# Altium PCB ALio Arduino ver.PcbDoc (part 1 of 2)
Units mm, origin at the board's own origin, x right, y up, seen from the top; angles counter-clockwise.
Board outline 88.22 x 65.31 mm, 2 copper layers (Top Layer, Bottom Layer); 443 components, 0 nets, 3065 pads, 0 vias.
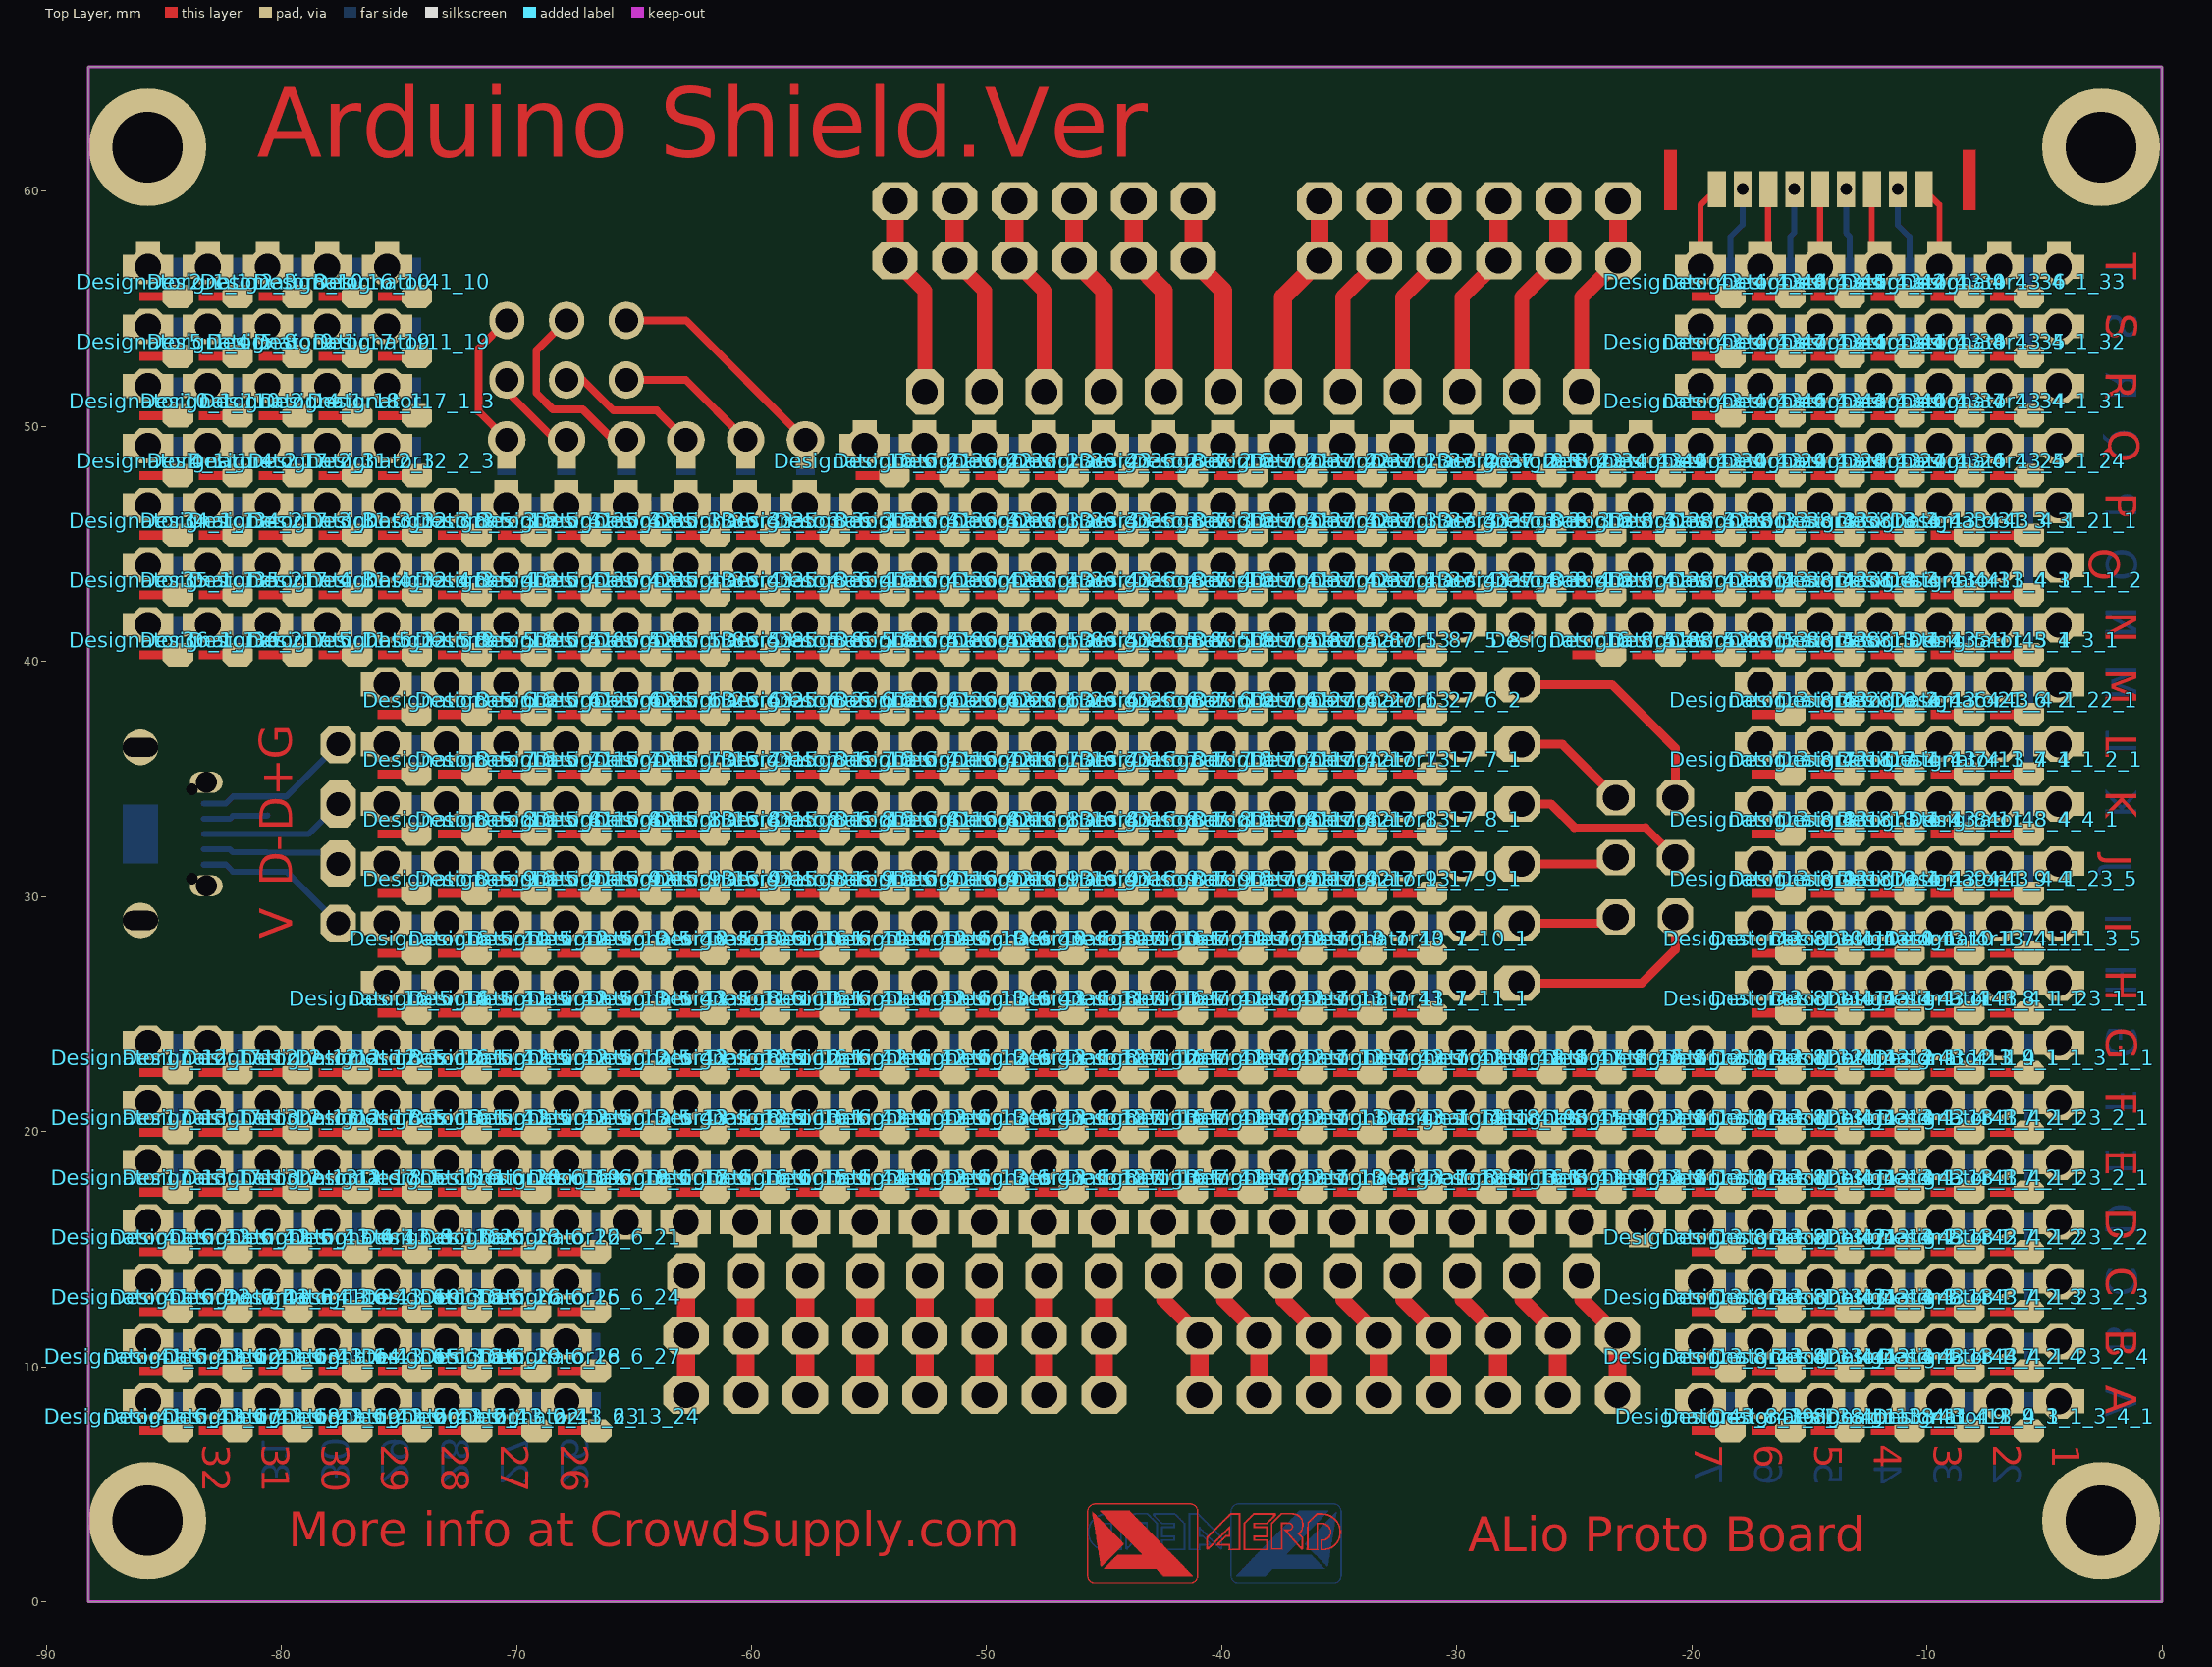
[diagram p0: Top Layer view]
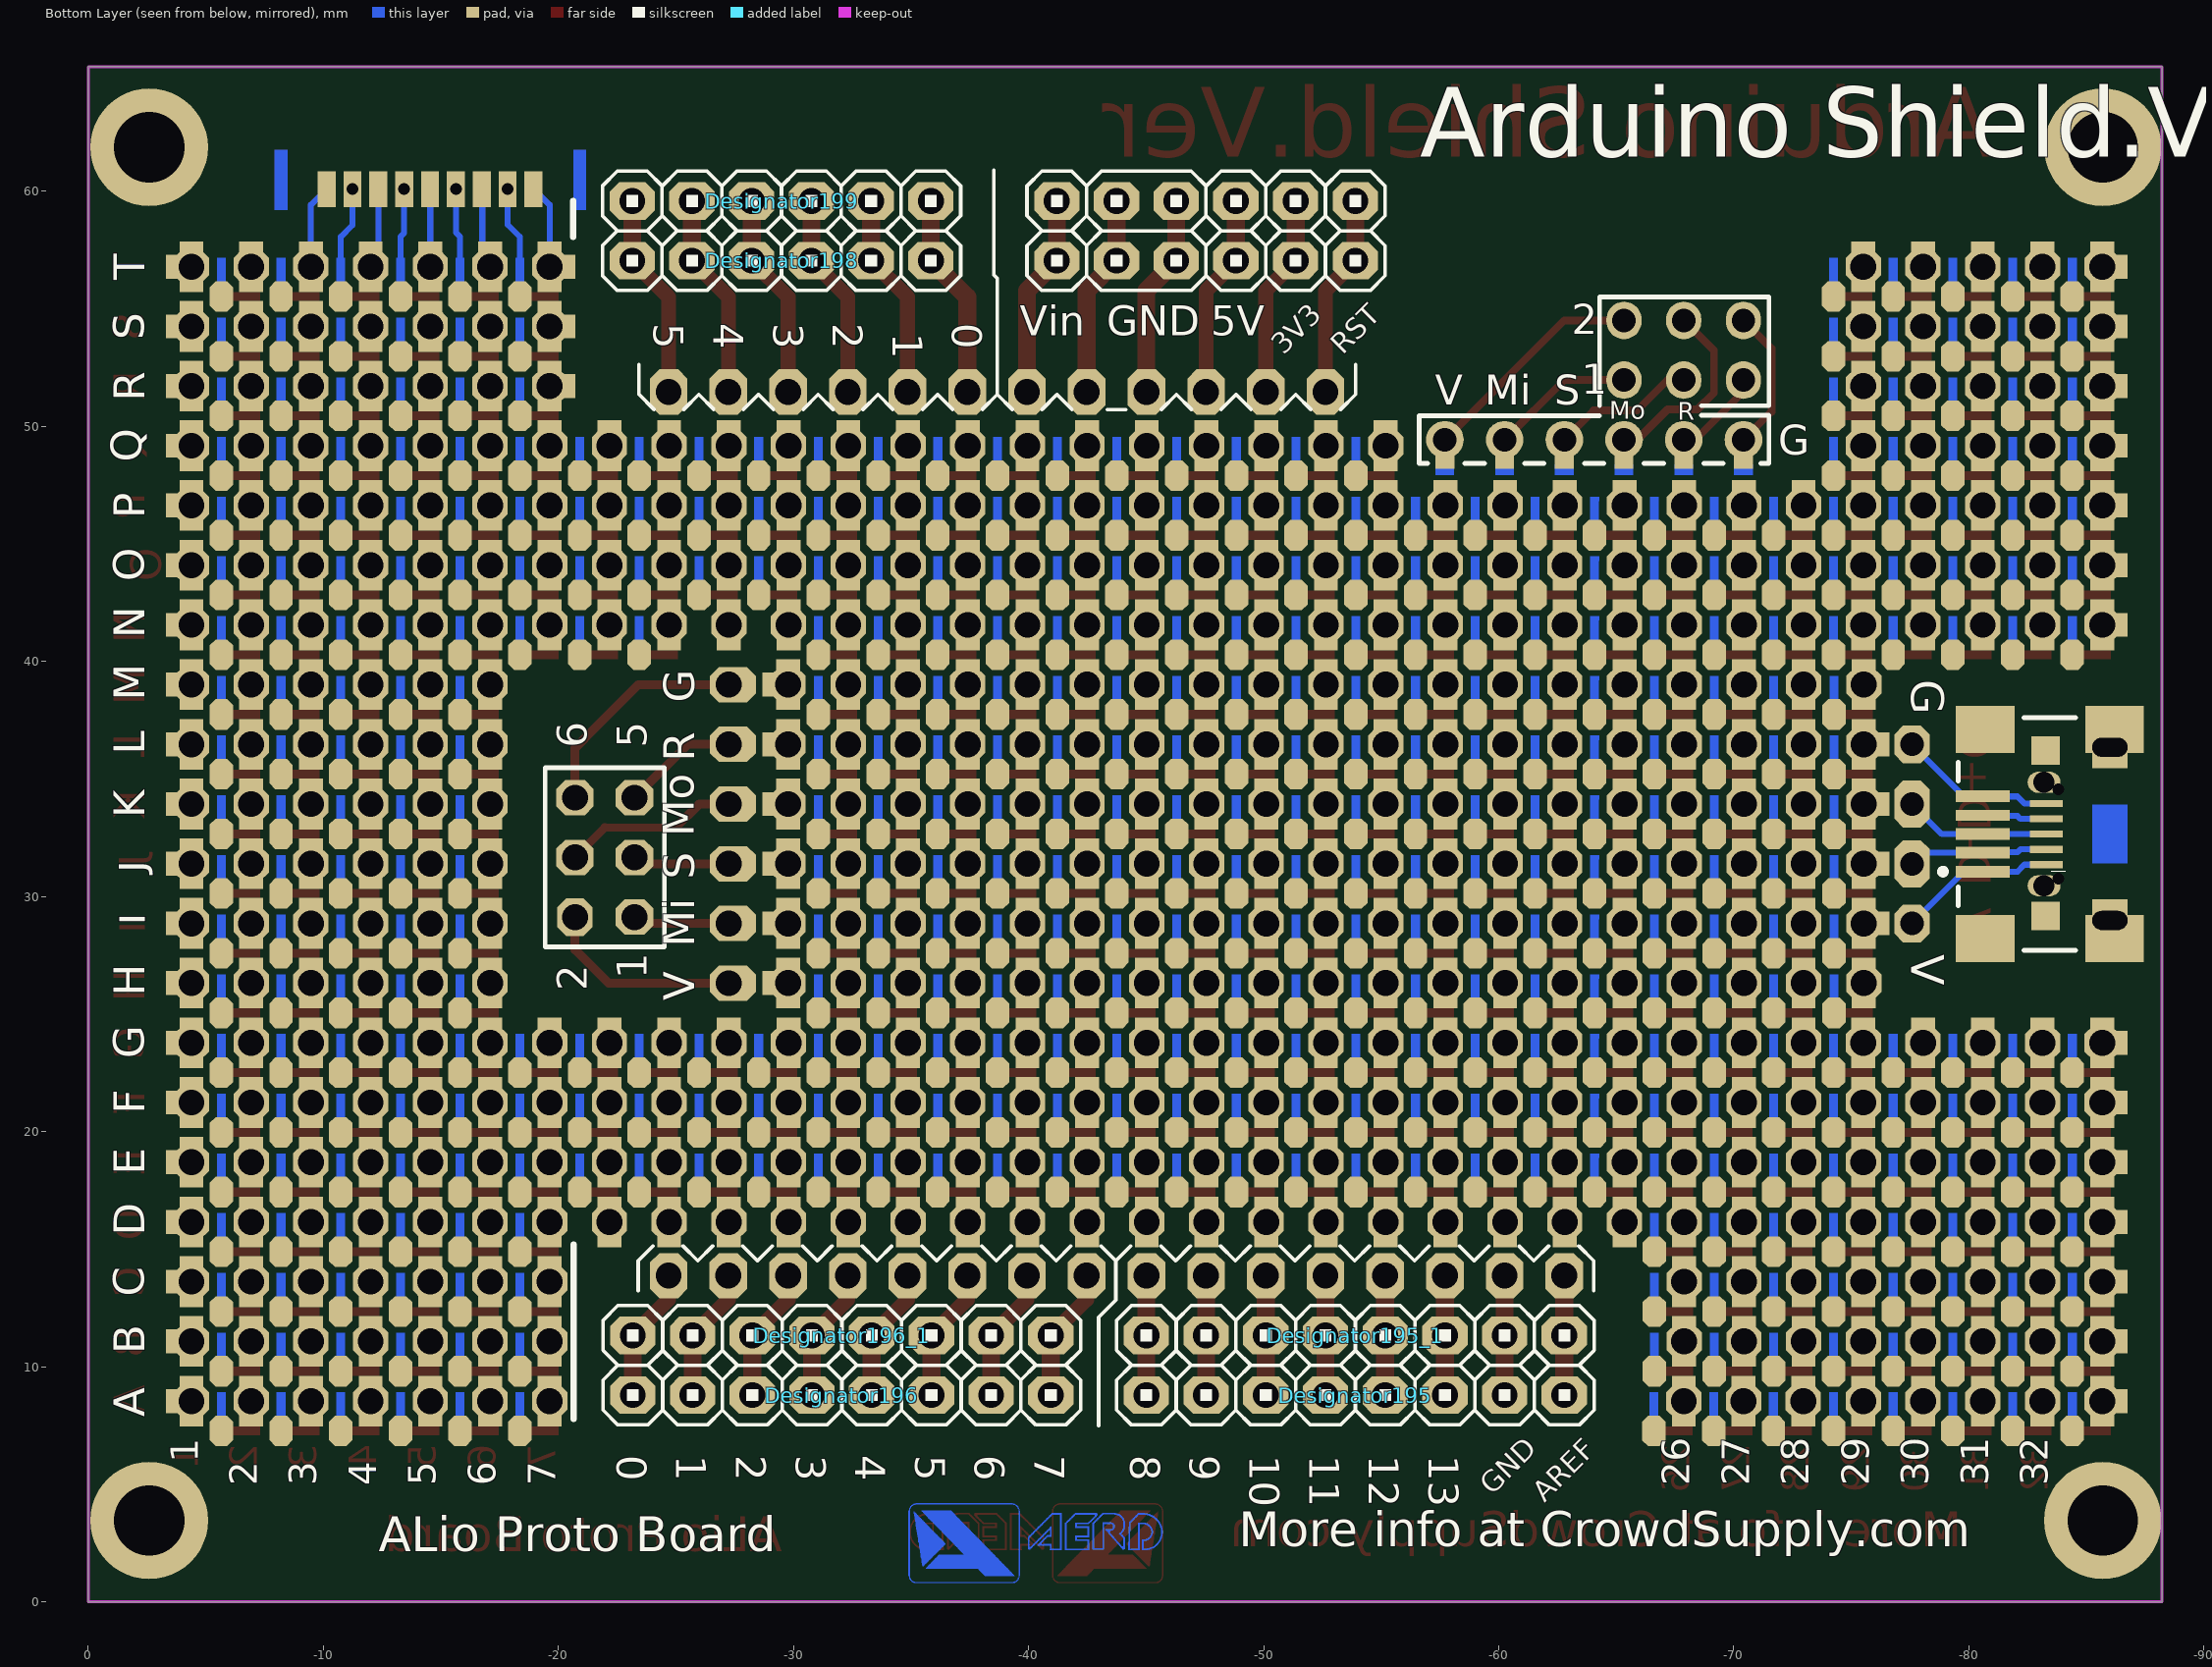
[diagram p1: Bottom Layer view, seen from below]

## Layer stack, top to bottom
Top Layer: signal copper 0.0356
Dielectric: dielectric 0.32, FR-4, Dk 4.8
Bottom Layer: signal copper 0.0356

## Board outline
-88.221,65.31 0,65.31 0,0 -88.221,0

## Design rules (kind name [scope] priority, off if disabled: settings)
Clearance [All] p1 off: gap=0.254
ComponentClearance [All] p1 off: gap=0.254 collisioncheckmode=3 verticalgap=0.254 showdistances=FALSE
HoleToHoleClearance [All] p1 off: gap=0.254 allowstackedmicrovias=TRUE
MinimumSolderMaskSliver [All] p1 off: minsoldermaskwidth=0.254
PolygonConnect [All] p1: connectstyle=Relief reliefconductorwidth=0.254 reliefentries=4 polygonreliefangle="90 Angle"
RoutingVias [All] p1: holewidth=0.711 width=1.27 viastyle="Through Hole" minholewidth=0.711 minwidth=1.27 maxholewidth=0.711 maxwidth=1.27
ShortCircuit [All] p1 off: allowed=FALSE
SilkscreenOverComponentPads [All] p1: minsilkscreentomaskgap=0.254
SolderMaskExpansion [All] p1: expansion=0.102
UnRoutedNet [All] p1 off:
Width [All] p1: maxlimit=1.016 minlimit=0.127 preferedwidth=0.254
22 further rules are at their usual default settings.

## Components (designator, comment, footprint, x,y, rotation, side; value= is the part's Value field where it differs from the comment)
Designator2_1_1 "Comment" PROTO2WL -85.672,56.8 r0 top
Designator2_3 "Comment" PROTO2WL -83.132,56.8 r0 top
Designator4_1_1 "Comment" PROTO2WL -85.672,49.18 r0 top
Designator4_2 "Comment" PROTO2WL -83.132,49.18 r0 top
Designator5_1_4 "Comment" PROTO2WL -85.672,54.26 r0 top
Designator5_8 "Comment" PROTO2WL -83.132,54.26 r0 top
Designator8_5_3_3 "Comment" PROTO2WL -72.972,46.64 r0 top
Designator8_5_4_3 "Comment" PROTO2WL -72.972,44.1 r0 top
Designator8_5_5_8 "Comment" PROTO2WL -72.972,41.56 r0 top
Designator8_5_6_2 "Comment" PROTO2WL -72.972,39.02 r0 top
Designator8_5_7_1 "Comment" PROTO2WL -72.972,36.48 r0 top
Designator8_5_8_1 "Comment" PROTO2WL -72.972,33.94 r0 top
Designator8_5_9_1 "Comment" PROTO2WL -72.972,31.4 r0 top
Designator8_5_12_1 "Comment" PROTO2WL -75.512,23.78 r0 top
Designator8_5_13_1 "Comment" PROTO2WL -75.512,18.7 r0 top
Designator8_5_13_1 "Comment" PROTO2WL -75.512,21.24 r0 top
Designator8_6_3_3 "Comment" PROTO2WL -57.732,46.64 r0 top
Designator8_6_4_3 "Comment" PROTO2WL -57.732,44.1 r0 top
Designator8_6_5_8 "Comment" PROTO2WL -57.732,41.56 r0 top
Designator8_6_6_2 "Comment" PROTO2WL -57.732,39.02 r0 top
Designator8_6_7_1 "Comment" PROTO2WL -57.732,36.48 r0 top
Designator8_6_8_1 "Comment" PROTO2WL -57.732,33.94 r0 top
Designator8_6_9_1 "Comment" PROTO2WL -57.732,31.4 r0 top
Designator8_6_10_1 "Comment" PROTO2WL -60.272,28.86 r0 top
Designator8_6_11_1 "Comment" PROTO2WL -60.272,26.32 r0 top
Designator8_6_12_1 "Comment" PROTO2WL -60.272,23.78 r0 top
Designator8_6_13_1 "Comment" PROTO2WL -60.272,21.24 r0 top
Designator8_7_2_3 "Comment" PROTO2WL -42.492,49.18 r0 top
Designator8_7_3_3 "Comment" PROTO2WL -42.492,46.64 r0 top
Designator8_7_4_3 "Comment" PROTO2WL -42.492,44.1 r0 top
Designator8_7_5_8 "Comment" PROTO2WL -42.492,41.56 r0 top
Designator8_7_6_2 "Comment" PROTO2WL -42.492,39.02 r0 top
Designator8_7_7_1 "Comment" PROTO2WL -42.492,36.48 r0 top
Designator8_7_8_1 "Comment" PROTO2WL -42.492,33.94 r0 top
Designator8_7_9_1 "Comment" PROTO2WL -42.492,31.4 r0 top
Designator8_7_10_1 "Comment" PROTO2WL -45.032,28.86 r0 top
Designator8_7_11_1 "Comment" PROTO2WL -45.032,26.32 r0 top
Designator8_7_12_1 "Comment" PROTO2WL -45.032,23.78 r0 top
Designator8_7_13_1 "Comment" PROTO2WL -45.032,18.7 r0 top
Designator8_7_13_1 "Comment" PROTO2WL -45.032,21.24 r0 top
Designator8_8_2_3 "Comment" PROTO2WL -27.252,49.18 r0 top
Designator8_8_3_3 "Comment" PROTO2WL -27.252,46.64 r0 top
Designator8_8_4_3 "Comment" PROTO2WL -27.252,44.1 r0 top
Designator8_8_13_1 "Comment" PROTO2WL -29.792,18.7 r0 top
Designator8_10 "Comment" PROTO2WL -80.592,56.8 r0 top
Designator9_1 "Comment" PROTO2WL -80.592,54.26 r0 top
Designator10_1_1 "Comment" PROTO2WL -85.672,51.72 r0 top
Designator10_2 "Comment" PROTO2WL -83.132,51.72 r0 top
Designator11_2_3 "Comment" PROTO2WL -78.052,49.18 r0 top
Designator11_3_3 "Comment" PROTO2WL -78.052,46.64 r0 top
Designator11_4_3 "Comment" PROTO2WL -78.052,44.1 r0 top
Designator11_5_2 "Comment" PROTO2WL -78.052,41.56 r0 top
Designator11_12_1 "Comment" PROTO2WL -80.592,23.78 r0 top
Designator11_13_1 "Comment" PROTO2WL -80.592,18.7 r0 top
Designator11_13_1 "Comment" PROTO2WL -80.592,21.24 r0 top
Designator11_19 "Comment" PROTO2WL -75.512,54.26 r0 top
Designator12_2_3 "Comment" PROTO2WL -75.512,49.18 r0 top
Designator12_3_3 "Comment" PROTO2WL -75.512,46.64 r0 top
Designator12_4_3 "Comment" PROTO2WL -75.512,44.1 r0 top
Designator12_5_8 "Comment" PROTO2WL -75.512,41.56 r0 top
Designator12_12_1 "Comment" PROTO2WL -78.052,23.78 r0 top
Designator12_17_1 "Comment" PROTO2WL -78.052,18.7 r0 top
Designator12_17_1 "Comment" PROTO2WL -78.052,21.24 r0 top
Designator13_4_1_1_1_2 "Comment" PROTO2WL -6.932,44.1 r0 top
Designator13_4_1_1_2_1 "Comment" PROTO2WL -6.932,36.48 r0 top
Designator13_4_1_1_3_1_1 "Comment" PROTO2WL -6.932,23.78 r0 top
Designator13_4_1_1_3_4_1 "Comment" PROTO2WL -6.932,8.54 r0 top
Designator13_4_1_1_3_5 "Comment" PROTO2WL -6.932,28.86 r0 top
Designator13_4_1_3_3 "Comment" PROTO2WL -12.012,46.64 r0 top
Designator13_4_1_4_3 "Comment" PROTO2WL -12.012,44.1 r0 top
Designator13_4_1_5_1 "Comment" PROTO2WL -12.012,41.56 r0 top
Designator13_4_1_6_2 "Comment" PROTO2WL -12.012,39.02 r0 top
Designator13_4_1_7_1 "Comment" PROTO2WL -12.012,36.48 r0 top
Designator13_4_1_8_1 "Comment" PROTO2WL -12.012,33.94 r0 top
Designator13_4_1_9_1 "Comment" PROTO2WL -12.012,31.4 r0 top
Designator13_4_1_10_1 "Comment" PROTO2WL -14.552,28.86 r0 top
Designator13_4_1_11_1 "Comment" PROTO2WL -14.552,26.32 r0 top
Designator13_4_1_12_1 "Comment" PROTO2WL -14.552,23.78 r0 top
Designator13_4_1_13_1 "Comment" PROTO2WL -14.552,21.24 r0 top
Designator13_4_1_13_1 "Comment" PROTO2WL -14.552,18.7 r0 top
Designator13_4_1_13_2 "Comment" PROTO2WL -14.552,16.16 r0 top
Designator13_4_1_13_3 "Comment" PROTO2WL -14.552,13.62 r0 top
Designator13_4_1_13_4 "Comment" PROTO2WL -14.552,11.08 r0 top
Designator13_4_1_18_1 "Comment" PROTO2WL -14.552,8.54 r0 top
Designator13_4_1_19 "Comment" PROTO2WL -12.012,8.54 r0 top
Designator13_5_3_3 "Comment" PROTO2WL -62.812,46.64 r0 top
Designator13_5_4_3 "Comment" PROTO2WL -62.812,44.1 r0 top
Designator13_5_5_8 "Comment" PROTO2WL -62.812,41.56 r0 top
Designator13_5_6_2 "Comment" PROTO2WL -62.812,39.02 r0 top
Designator13_5_7_1 "Comment" PROTO2WL -62.812,36.48 r0 top
Designator13_5_8_1 "Comment" PROTO2WL -62.812,33.94 r0 top
Designator13_5_9_1 "Comment" PROTO2WL -62.812,31.4 r0 top
Designator13_5_10_1 "Comment" PROTO2WL -65.352,28.86 r0 top
Designator13_5_11_1 "Comment" PROTO2WL -65.352,26.32 r0 top
Designator13_5_12_1 "Comment" PROTO2WL -65.352,23.78 r0 top
Designator13_5_13_1 "Comment" PROTO2WL -65.352,21.24 r0 top
Designator13_6_2_3 "Comment" PROTO2WL -47.572,49.18 r0 top
Designator13_6_3_3 "Comment" PROTO2WL -47.572,46.64 r0 top
Designator13_6_4_3 "Comment" PROTO2WL -47.572,44.1 r0 top
Designator13_6_5_8 "Comment" PROTO2WL -47.572,41.56 r0 top
Designator13_6_6_2 "Comment" PROTO2WL -47.572,39.02 r0 top
Designator13_6_7_1 "Comment" PROTO2WL -47.572,36.48 r0 top
Designator13_6_8_1 "Comment" PROTO2WL -47.572,33.94 r0 top
Designator13_6_9_1 "Comment" PROTO2WL -47.572,31.4 r0 top
Designator13_6_10_1 "Comment" PROTO2WL -50.112,28.86 r0 top
Designator13_6_11_1 "Comment" PROTO2WL -50.112,26.32 r0 top
Designator13_6_12_1 "Comment" PROTO2WL -50.112,23.78 r0 top
Designator13_6_13_1 "Comment" PROTO2WL -50.112,18.7 r0 top
Designator13_6_13_1 "Comment" PROTO2WL -50.112,21.24 r0 top
Designator13_7_2_3 "Comment" PROTO2WL -32.332,49.18 r0 top
Designator13_7_3_3 "Comment" PROTO2WL -32.332,46.64 r0 top
Designator13_7_4_3 "Comment" PROTO2WL -32.332,44.1 r0 top
Designator13_7_5_8 "Comment" PROTO2WL -32.332,41.56 r0 top
Designator13_7_6_2 "Comment" PROTO2WL -32.332,39.02 r0 top
Designator13_7_7_1 "Comment" PROTO2WL -32.332,36.48 r0 top
Designator13_7_8_1 "Comment" PROTO2WL -32.332,33.94 r0 top
Designator13_7_9_1 "Comment" PROTO2WL -32.332,31.4 r0 top
Designator13_7_10_1 "Comment" PROTO2WL -34.872,28.86 r0 top
Designator13_7_11_1 "Comment" PROTO2WL -34.872,26.32 r0 top
Designator13_7_12_1 "Comment" PROTO2WL -34.872,23.78 r0 top
Designator13_7_13_1 "Comment" PROTO2WL -34.872,18.7 r0 top
Designator13_7_13_1 "Comment" PROTO2WL -34.872,21.24 r0 top
Designator13_8_3_3 "Comment" PROTO2WL -17.092,46.64 r0 top
Designator13_8_4_3 "Comment" PROTO2WL -17.092,44.1 r0 top
Designator13_8_5_8 "Comment" PROTO2WL -17.092,41.56 r0 top
Designator13_8_6_2 "Comment" PROTO2WL -17.092,39.02 r0 top
Designator13_8_7_1 "Comment" PROTO2WL -17.092,36.48 r0 top
Designator13_8_8_1 "Comment" PROTO2WL -17.092,33.94 r0 top
Designator13_8_9_1 "Comment" PROTO2WL -17.092,31.4 r0 top
Designator13_8_12_1 "Comment" PROTO2WL -19.632,23.78 r0 top
Designator13_8_13_1 "Comment" PROTO2WL -19.632,21.24 r0 top
Designator13_8_13_1 "Comment" PROTO2WL -19.632,18.7 r0 top
Designator13_8_13_2 "Comment" PROTO2WL -19.632,16.16 r0 top
Designator13_8_13_3 "Comment" PROTO2WL -19.632,13.62 r0 top
Designator13_8_13_4 "Comment" PROTO2WL -19.632,11.08 r0 top
Designator14_1 "Comment" PROTO2WL -80.592,51.72 r0 top
Designator16_5_3_3 "Comment" PROTO2WL -70.432,46.64 r0 top
Designator16_5_4_3 "Comment" PROTO2WL -70.432,44.1 r0 top
Designator16_5_5_8 "Comment" PROTO2WL -70.432,41.56 r0 top
Designator16_5_6_2 "Comment" PROTO2WL -70.432,39.02 r0 top
Designator16_5_7_1 "Comment" PROTO2WL -70.432,36.48 r0 top
Designator16_5_8_1 "Comment" PROTO2WL -70.432,33.94 r0 top
Designator16_5_9_1 "Comment" PROTO2WL -70.432,31.4 r0 top
Designator16_5_10_1 "Comment" PROTO2WL -72.972,28.86 r0 top
Designator16_5_11_1 "Comment" PROTO2WL -72.972,26.32 r0 top
Designator16_5_12_1 "Comment" PROTO2WL -72.972,23.78 r0 top
Designator16_5_13_1 "Comment" PROTO2WL -72.972,21.24 r0 top
Designator16_5_14_1 "Comment" PROTO2WL -75.535,26.32 r0 top
Designator16_6_2_3 "Comment" PROTO2WL -55.192,49.18 r0 top
Designator16_6_3_3 "Comment" PROTO2WL -55.192,46.64 r0 top
Designator16_6_4_3 "Comment" PROTO2WL -55.192,44.1 r0 top
Designator16_6_5_8 "Comment" PROTO2WL -55.192,41.56 r0 top
Designator16_6_6_2 "Comment" PROTO2WL -55.192,39.02 r0 top
Designator16_6_7_1 "Comment" PROTO2WL -55.192,36.48 r0 top
Designator16_6_8_1 "Comment" PROTO2WL -55.192,33.94 r0 top
Designator16_6_9_1 "Comment" PROTO2WL -55.192,31.4 r0 top
Designator16_6_10_1 "Comment" PROTO2WL -57.732,28.86 r0 top
Designator16_6_11_1 "Comment" PROTO2WL -57.732,26.32 r0 top
Designator16_6_12_1 "Comment" PROTO2WL -57.732,23.78 r0 top
Designator16_6_13_1 "Comment" PROTO2WL -57.732,21.24 r0 top
Designator16_6_14_1 "Comment" PROTO2WL -57.732,18.7 r0 top
Designator16_6_15_1 "Comment" PROTO2WL -60.272,18.7 r0 top
Designator16_6_16_1 "Comment" PROTO2WL -62.812,18.7 r0 top
Designator16_6_17_1 "Comment" PROTO2WL -65.352,18.7 r0 top
Designator16_6_18_1 "Comment" PROTO2WL -67.892,18.7 r0 top
Designator16_6_19 "Comment" PROTO2WL -70.432,18.7 r0 top
Designator16_6_20 "Comment" PROTO2WL -72.972,18.7 r0 top
Designator16_6_21 "Comment" PROTO2WL -67.892,16.16 r0 top
Designator16_6_22 "Comment" PROTO2WL -70.432,16.16 r0 top
Designator16_6_23 "Comment" PROTO2WL -72.972,16.16 r0 top
Designator16_6_24 "Comment" PROTO2WL -67.892,13.62 r0 top
Designator16_6_25 "Comment" PROTO2WL -70.432,13.62 r0 top
Designator16_6_26 "Comment" PROTO2WL -72.972,13.62 r0 top
Designator16_6_27 "Comment" PROTO2WL -67.892,11.08 r0 top
Designator16_6_28 "Comment" PROTO2WL -70.432,11.08 r0 top
Designator16_6_29 "Comment" PROTO2WL -72.972,11.08 r0 top
Designator16_7_2_3 "Comment" PROTO2WL -39.952,49.18 r0 top
Designator16_7_3_3 "Comment" PROTO2WL -39.952,46.64 r0 top
Designator16_7_4_3 "Comment" PROTO2WL -39.952,44.1 r0 top
Designator16_7_5_8 "Comment" PROTO2WL -39.952,41.56 r0 top
Designator16_7_6_2 "Comment" PROTO2WL -39.952,39.02 r0 top
Designator16_7_7_1 "Comment" PROTO2WL -39.952,36.48 r0 top
Designator16_7_8_1 "Comment" PROTO2WL -39.952,33.94 r0 top
Designator16_7_9_1 "Comment" PROTO2WL -39.952,31.4 r0 top
Designator16_7_10_1 "Comment" PROTO2WL -42.492,28.86 r0 top
Designator16_7_11_1 "Comment" PROTO2WL -42.492,26.32 r0 top
Designator16_7_12_1 "Comment" PROTO2WL -42.492,23.78 r0 top
Designator16_7_13_1 "Comment" PROTO2WL -42.492,18.7 r0 top
Designator16_7_13_1 "Comment" PROTO2WL -42.492,21.24 r0 top
Designator16_8_3_3 "Comment" PROTO2WL -24.712,46.64 r0 top
Designator16_8_4_3 "Comment" PROTO2WL -24.712,44.1 r0 top
Designator16_8_5_8 "Comment" PROTO2WL -24.712,41.56 r0 top
Designator16_8_13_1 "Comment" PROTO2WL -27.252,18.7 r0 top
Designator16_10 "Comment" PROTO2WL -78.052,56.8 r0 top
Designator17_1_3 "Comment" PROTO2WL -75.512,51.72 r0 top
Designator17_2_3 "Comment" PROTO2WL -80.592,49.18 r0 top
Designator17_3_3 "Comment" PROTO2WL -80.592,46.64 r0 top
Designator17_4_3 "Comment" PROTO2WL -80.592,44.1 r0 top
Designator17_5_1 "Comment" PROTO2WL -80.592,41.56 r0 top
Designator17_12_1_1 "Comment" PROTO2WL -85.672,23.78 r0 top
Designator17_12_2 "Comment" PROTO2WL -83.132,23.78 r0 top
Designator17_13_1_1 "Comment" PROTO2WL -85.672,18.7 r0 top
Designator17_13_1_1 "Comment" PROTO2WL -85.672,21.24 r0 top
Designator17_13_2 "Comment" PROTO2WL -83.132,18.7 r0 top
Designator17_13_2 "Comment" PROTO2WL -83.132,21.24 r0 top
Designator17_19 "Comment" PROTO2WL -78.052,54.26 r0 top
Designator18_1 "Comment" PROTO2WL -78.052,51.72 r0 top
Designator34_1_1 "Comment" PROTO2WL -85.672,46.64 r0 top
Designator34_2 "Comment" PROTO2WL -83.132,46.64 r0 top
Designator35_1_1 "Comment" PROTO2WL -85.672,44.1 r0 top
Designator35_2 "Comment" PROTO2WL -83.132,44.1 r0 top
Designator36_1_1 "Comment" PROTO2WL -85.672,41.56 r0 top
Designator36_2 "Comment" PROTO2WL -83.132,41.56 r0 top
Designator41_5_3_3 "Comment" PROTO2WL -67.892,46.64 r0 top
Designator41_5_4_3 "Comment" PROTO2WL -67.892,44.1 r0 top
Designator41_5_5_8 "Comment" PROTO2WL -67.892,41.56 r0 top
Designator41_5_6_2 "Comment" PROTO2WL -67.892,39.02 r0 top
Designator41_5_7_1 "Comment" PROTO2WL -67.892,36.48 r0 top
Designator41_5_8_1 "Comment" PROTO2WL -67.892,33.94 r0 top
Designator41_5_9_1 "Comment" PROTO2WL -67.892,31.4 r0 top
Designator41_5_10_1 "Comment" PROTO2WL -70.432,28.86 r0 top
Designator41_5_11_1 "Comment" PROTO2WL -70.432,26.32 r0 top
Designator41_5_12_1 "Comment" PROTO2WL -70.432,23.78 r0 top
Designator41_5_13_1 "Comment" PROTO2WL -70.432,21.24 r0 top
Designator41_6_2_3 "Comment" PROTO2WL -52.652,49.18 r0 top
Designator41_6_3_3 "Comment" PROTO2WL -52.652,46.64 r0 top
Designator41_6_4_3 "Comment" PROTO2WL -52.652,44.1 r0 top
Designator41_6_5_8 "Comment" PROTO2WL -52.652,41.56 r0 top
Designator41_6_6_2 "Comment" PROTO2WL -52.652,39.02 r0 top
Designator41_6_7_1 "Comment" PROTO2WL -52.652,36.48 r0 top
Designator41_6_8_1 "Comment" PROTO2WL -52.652,33.94 r0 top
Designator41_6_9_1 "Comment" PROTO2WL -52.652,31.4 r0 top
Designator41_6_10_1 "Comment" PROTO2WL -55.192,28.86 r0 top
Designator41_6_11_1 "Comment" PROTO2WL -55.192,26.32 r0 top
Designator41_6_12_1 "Comment" PROTO2WL -55.192,23.78 r0 top
Designator41_6_13_1 "Comment" PROTO2WL -55.192,18.7 r0 top
Designator41_6_13_1 "Comment" PROTO2WL -55.192,21.24 r0 top
Designator41_6_13_2 "Comment" PROTO2WL -75.512,16.16 r0 top
Designator41_6_13_3 "Comment" PROTO2WL -78.052,16.16 r0 top
Designator41_6_13_4 "Comment" PROTO2WL -80.592,16.16 r0 top
Designator41_6_13_5 "Comment" PROTO2WL -83.132,16.16 r0 top
Designator41_6_13_6 "Comment" PROTO2WL -85.672,16.16 r0 top
Designator41_6_13_7 "Comment" PROTO2WL -85.672,13.62 r0 top
Designator41_6_13_8 "Comment" PROTO2WL -83.132,13.62 r0 top
Designator41_6_13_9 "Comment" PROTO2WL -80.592,13.62 r0 top
Designator41_6_13_10 "Comment" PROTO2WL -78.052,13.62 r0 top
Designator41_6_13_11 "Comment" PROTO2WL -75.512,13.62 r0 top
Designator41_6_13_12 "Comment" PROTO2WL -85.672,11.08 r0 top
Designator41_6_13_13 "Comment" PROTO2WL -83.132,11.08 r0 top
Designator41_6_13_14 "Comment" PROTO2WL -80.592,11.08 r0 top
Designator41_6_13_15 "Comment" PROTO2WL -78.052,11.08 r0 top
Designator41_6_13_16 "Comment" PROTO2WL -75.512,11.08 r0 top
Designator41_6_13_17 "Comment" PROTO2WL -85.672,8.54 r0 top
Designator41_6_13_18 "Comment" PROTO2WL -83.132,8.54 r0 top
Designator41_6_13_19 "Comment" PROTO2WL -80.592,8.54 r0 top
Designator41_6_13_20 "Comment" PROTO2WL -78.052,8.54 r0 top
Designator41_6_13_21 "Comment" PROTO2WL -75.512,8.54 r0 top
Designator41_6_13_22 "Comment" PROTO2WL -72.956,8.538 r0 top
Designator41_6_13_23 "Comment" PROTO2WL -70.416,8.538 r0 top
Designator41_6_13_24 "Comment" PROTO2WL -67.876,8.538 r0 top
Designator41_7_2_3 "Comment" PROTO2WL -37.412,49.18 r0 top
Designator41_7_3_3 "Comment" PROTO2WL -37.412,46.64 r0 top
Designator41_7_4_3 "Comment" PROTO2WL -37.412,44.1 r0 top
Designator41_7_5_8 "Comment" PROTO2WL -37.412,41.56 r0 top
Designator41_7_6_2 "Comment" PROTO2WL -37.412,39.02 r0 top
Designator41_7_7_1 "Comment" PROTO2WL -37.412,36.48 r0 top
Designator41_7_8_1 "Comment" PROTO2WL -37.412,33.94 r0 top
Designator41_7_9_1 "Comment" PROTO2WL -37.412,31.4 r0 top
Designator41_7_10_1 "Comment" PROTO2WL -39.952,28.86 r0 top
Designator41_7_11_1 "Comment" PROTO2WL -39.952,26.32 r0 top
Designator41_7_12_1 "Comment" PROTO2WL -39.952,23.78 r0 top
Designator41_7_13_1 "Comment" PROTO2WL -39.952,18.7 r0 top
Designator41_7_13_1 "Comment" PROTO2WL -39.952,21.24 r0 top
Designator41_8_3_3 "Comment" PROTO2WL -22.172,46.64 r0 top
Designator41_8_4_3 "Comment" PROTO2WL -22.172,44.1 r0 top
Designator41_8_5_8 "Comment" PROTO2WL -22.172,41.56 r0 top
Designator41_8_13_1 "Comment" PROTO2WL -24.712,21.24 r0 top
Designator41_8_14_1 "Comment" PROTO2WL -24.712,18.7 r0 top
Designator41_8_15_1 "Comment" PROTO2WL -27.252,21.24 r0 top
Designator41_8_16_1 "Comment" PROTO2WL -24.712,23.78 r0 top
Designator41_8_17_1 "Comment" PROTO2WL -27.252,23.78 r0 top
Designator41_8_18_1 "Comment" PROTO2WL -29.792,23.78 r0 top
Designator41_8_19 "Comment" PROTO2WL -29.792,21.24 r0 top
Designator41_10 "Comment" PROTO2WL -75.512,56.8 r0 top
Designator42_5_3_3 "Comment" PROTO2WL -65.352,46.64 r0 top
Designator42_5_4_3 "Comment" PROTO2WL -65.352,44.1 r0 top
Designator42_5_5_8 "Comment" PROTO2WL -65.352,41.56 r0 top
Designator42_5_6_2 "Comment" PROTO2WL -65.352,39.02 r0 top
Designator42_5_7_1 "Comment" PROTO2WL -65.352,36.48 r0 top
Designator42_5_8_1 "Comment" PROTO2WL -65.352,33.94 r0 top
Designator42_5_9_1 "Comment" PROTO2WL -65.352,31.4 r0 top
Designator42_5_10_1 "Comment" PROTO2WL -67.892,28.86 r0 top
Designator42_5_11_1 "Comment" PROTO2WL -67.892,26.32 r0 top
Designator42_5_12_1 "Comment" PROTO2WL -67.892,23.78 r0 top
Designator42_5_13_1 "Comment" PROTO2WL -67.892,21.24 r0 top
Designator42_6_2_3 "Comment" PROTO2WL -50.112,49.18 r0 top
Designator42_6_3_3 "Comment" PROTO2WL -50.112,46.64 r0 top
Designator42_6_4_3 "Comment" PROTO2WL -50.112,44.1 r0 top
Designator42_6_5_8 "Comment" PROTO2WL -50.112,41.56 r0 top
Designator42_6_6_2 "Comment" PROTO2WL -50.112,39.02 r0 top
Designator42_6_7_1 "Comment" PROTO2WL -50.112,36.48 r0 top
Designator42_6_8_1 "Comment" PROTO2WL -50.112,33.94 r0 top
Designator42_6_9_1 "Comment" PROTO2WL -50.112,31.4 r0 top
Designator42_6_10_1 "Comment" PROTO2WL -52.652,28.86 r0 top
Designator42_6_11_1 "Comment" PROTO2WL -52.652,26.32 r0 top
Designator42_6_12_1 "Comment" PROTO2WL -52.652,23.78 r0 top
Designator42_6_13_1 "Comment" PROTO2WL -52.652,18.7 r0 top
Designator42_6_13_1 "Comment" PROTO2WL -52.652,21.24 r0 top
Designator42_7_2_3 "Comment" PROTO2WL -34.872,49.18 r0 top
Designator42_7_3_3 "Comment" PROTO2WL -34.872,46.64 r0 top
Designator42_7_4_3 "Comment" PROTO2WL -34.872,44.1 r0 top
Designator42_7_5_8 "Comment" PROTO2WL -34.872,41.56 r0 top
Designator42_7_6_2 "Comment" PROTO2WL -34.872,39.02 r0 top
Designator42_7_7_1 "Comment" PROTO2WL -34.872,36.48 r0 top
Designator42_7_8_1 "Comment" PROTO2WL -34.872,33.94 r0 top
Designator42_7_9_1 "Comment" PROTO2WL -34.872,31.4 r0 top
Designator42_7_10_1 "Comment" PROTO2WL -37.412,28.86 r0 top
Designator42_7_11_1 "Comment" PROTO2WL -37.412,26.32 r0 top
Designator42_7_12_1 "Comment" PROTO2WL -37.412,23.78 r0 top
Designator42_7_13_1 "Comment" PROTO2WL -37.412,18.7 r0 top
Designator42_7_13_1 "Comment" PROTO2WL -37.412,21.24 r0 top
Designator42_8_3_3 "Comment" PROTO2WL -19.632,46.64 r0 top
Designator42_8_4_3 "Comment" PROTO2WL -19.632,44.1 r0 top
Designator42_8_5_8 "Comment" PROTO2WL -19.632,41.56 r0 top
Designator42_8_12_1 "Comment" PROTO2WL -22.172,23.78 r0 top
Designator42_8_13_1 "Comment" PROTO2WL -22.172,21.24 r0 top
Designator42_8_13_1 "Comment" PROTO2WL -22.172,18.7 r0 top
Designator43_4_1_3_3 "Comment" PROTO2WL -9.472,46.64 r0 top
Designator43_4_1_4_3 "Comment" PROTO2WL -9.472,44.1 r0 top
Designator43_4_1_5_1 "Comment" PROTO2WL -9.472,41.56 r0 top
Designator43_4_1_6_2 "Comment" PROTO2WL -9.472,39.02 r0 top
Designator43_4_1_7_1_1 "Comment" PROTO2WL -9.472,28.86 r0 top
Designator43_4_1_7_2_1 "Comment" PROTO2WL -9.472,21.24 r0 top
Designator43_4_1_7_2_1 "Comment" PROTO2WL -9.472,18.7 r0 top
Designator43_4_1_7_2_2 "Comment" PROTO2WL -9.472,16.16 r0 top
Designator43_4_1_7_2_3 "Comment" PROTO2WL -9.472,13.62 r0 top
Designator43_4_1_7_2_4 "Comment" PROTO2WL -9.472,11.08 r0 top
Designator43_4_1_7_4 "Comment" PROTO2WL -9.472,36.48 r0 top
Designator43_4_1_8_1_1 "Comment" PROTO2WL -9.472,26.32 r0 top
Designator43_4_1_8_4 "Comment" PROTO2WL -9.472,33.94 r0 top
Designator43_4_1_9_1_1 "Comment" PROTO2WL -9.472,23.78 r0 top
Designator43_4_1_9_3_1 "Comment" PROTO2WL -9.472,8.54 r0 top
Designator43_4_1_9_4 "Comment" PROTO2WL -9.472,31.4 r0 top
Designator43_4_1_10_1 "Comment" PROTO2WL -12.012,28.86 r0 top
Designator43_4_1_11_1 "Comment" PROTO2WL -12.012,26.32 r0 top
Designator43_4_1_12_1 "Comment" PROTO2WL -12.012,23.78 r0 top
Designator43_4_1_13_1 "Comment" PROTO2WL -12.012,21.24 r0 top
Designator43_4_1_13_1 "Comment" PROTO2WL -12.012,18.7 r0 top
Designator43_4_1_13_2 "Comment" PROTO2WL -12.012,16.16 r0 top
Designator43_4_1_13_3 "Comment" PROTO2WL -12.012,13.62 r0 top
Designator43_4_1_13_4 "Comment" PROTO2WL -12.012,11.08 r0 top
Designator43_4_1_21_1 "Comment" PROTO2WL -6.932,46.64 r0 top
Designator43_4_1_22_1 "Comment" PROTO2WL -6.932,39.02 r0 top
Designator43_4_1_23_1_1 "Comment" PROTO2WL -6.932,26.32 r0 top
Designator43_4_1_23_2_1 "Comment" PROTO2WL -6.932,21.24 r0 top
Designator43_4_1_23_2_1 "Comment" PROTO2WL -6.932,18.7 r0 top
Designator43_4_1_23_2_2 "Comment" PROTO2WL -6.932,16.16 r0 top
Designator43_4_1_23_2_3 "Comment" PROTO2WL -6.932,13.62 r0 top
Designator43_4_1_23_2_4 "Comment" PROTO2WL -6.932,11.08 r0 top
Designator43_4_1_23_5 "Comment" PROTO2WL -6.932,31.4 r0 top
Designator43_4_1_24 "Comment" PROTO2WL -6.932,49.18 r0 top
Designator43_4_1_25 "Comment" PROTO2WL -9.472,49.18 r0 top
Designator43_4_1_26 "Comment" PROTO2WL -12.012,49.18 r0 top
Designator43_4_1_27 "Comment" PROTO2WL -14.552,49.18 r0 top
Designator43_4_1_28 "Comment" PROTO2WL -17.092,49.18 r0 top
Designator43_4_1_29 "Comment" PROTO2WL -19.632,49.18 r0 top
Designator43_4_1_30 "Comment" PROTO2WL -22.172,49.18 r0 top
Designator43_4_1_31 "Comment" PROTO2WL -6.932,51.72 r0 top
Designator43_4_1_32 "Comment" PROTO2WL -6.932,54.26 r0 top
Designator43_4_1_33 "Comment" PROTO2WL -6.932,56.8 r0 top
Designator43_4_1_34 "Comment" PROTO2WL -9.472,51.72 r0 top
Designator43_4_1_35 "Comment" PROTO2WL -9.472,54.26 r0 top
Designator43_4_1_36 "Comment" PROTO2WL -9.472,56.8 r0 top
Designator43_4_1_37 "Comment" PROTO2WL -12.012,51.72 r0 top
Designator43_4_1_38 "Comment" PROTO2WL -12.012,54.26 r0 top
Designator43_4_1_39 "Comment" PROTO2WL -12.012,56.8 r0 top
Designator43_4_1_40 "Comment" PROTO2WL -14.552,51.72 r0 top
Designator43_4_1_41 "Comment" PROTO2WL -14.552,54.26 r0 top
Designator43_4_1_42 "Comment" PROTO2WL -14.552,56.8 r0 top
Designator43_4_1_43 "Comment" PROTO2WL -17.092,51.72 r0 top
Designator43_4_1_44 "Comment" PROTO2WL -17.092,54.26 r0 top
Designator43_4_1_45 "Comment" PROTO2WL -17.092,56.8 r0 top
Designator43_4_1_46 "Comment" PROTO2WL -19.632,51.72 r0 top
Designator43_4_1_47 "Comment" PROTO2WL -19.632,54.26 r0 top
Designator43_4_1_48 "Comment" PROTO2WL -19.632,56.8 r0 top
Designator43_4_1_49 "Comment" PROTO2WL -24.712,49.18 r0 top
Designator43_4_3_1 "Comment" PROTO2WL -6.932,41.56 r0 top
Designator43_4_4_1 "Comment" PROTO2WL -6.932,33.94 r0 top
Designator43_5_3_3 "Comment" PROTO2WL -60.272,46.64 r0 top
Designator43_5_4_3 "Comment" PROTO2WL -60.272,44.1 r0 top
Designator43_5_5_8 "Comment" PROTO2WL -60.272,41.56 r0 top
Designator43_5_6_2 "Comment" PROTO2WL -60.272,39.02 r0 top
Designator43_5_7_1 "Comment" PROTO2WL -60.272,36.48 r0 top
Designator43_5_8_1 "Comment" PROTO2WL -60.272,33.94 r0 top
Designator43_5_9_1 "Comment" PROTO2WL -60.272,31.4 r0 top
Designator43_5_10_1 "Comment" PROTO2WL -62.812,28.86 r0 top
Designator43_5_11_1 "Comment" PROTO2WL -62.812,26.32 r0 top
Designator43_5_12_1 "Comment" PROTO2WL -62.812,23.78 r0 top
Designator43_5_13_1 "Comment" PROTO2WL -62.812,21.24 r0 top
Designator43_6_2_3 "Comment" PROTO2WL -45.032,49.18 r0 top
Designator43_6_3_3 "Comment" PROTO2WL -45.032,46.64 r0 top
Designator43_6_4_3 "Comment" PROTO2WL -45.032,44.1 r0 top
Designator43_6_5_8 "Comment" PROTO2WL -45.032,41.56 r0 top
Designator43_6_6_2 "Comment" PROTO2WL -45.032,39.02 r0 top
Designator43_6_7_1 "Comment" PROTO2WL -45.032,36.48 r0 top
Designator43_6_8_1 "Comment" PROTO2WL -45.032,33.94 r0 top
Designator43_6_9_1 "Comment" PROTO2WL -45.032,31.4 r0 top
Designator43_6_10_1 "Comment" PROTO2WL -47.572,28.86 r0 top
Designator43_6_11_1 "Comment" PROTO2WL -47.572,26.32 r0 top
Designator43_6_12_1 "Comment" PROTO2WL -47.572,23.78 r0 top
Designator43_6_13_1 "Comment" PROTO2WL -47.572,18.7 r0 top
Designator43_6_13_1 "Comment" PROTO2WL -47.572,21.24 r0 top
Designator43_7_2_3 "Comment" PROTO2WL -29.792,49.18 r0 top
Designator43_7_3_3 "Comment" PROTO2WL -29.792,46.64 r0 top
Designator43_7_4_3 "Comment" PROTO2WL -29.792,44.1 r0 top
Designator43_7_10_1 "Comment" PROTO2WL -32.332,28.86 r0 top
Designator43_7_11_1 "Comment" PROTO2WL -32.332,26.32 r0 top
Designator43_7_12_1 "Comment" PROTO2WL -32.332,23.78 r0 top
Designator43_7_13_1 "Comment" PROTO2WL -32.332,18.7 r0 top
Designator43_7_13_1 "Comment" PROTO2WL -32.332,21.24 r0 top
Designator43_8_3_3 "Comment" PROTO2WL -14.552,46.64 r0 top
Designator43_8_4_3 "Comment" PROTO2WL -14.552,44.1 r0 top
Designator43_8_5_1 "Comment" PROTO2WL -14.552,41.56 r0 top
Designator43_8_6_2 "Comment" PROTO2WL -14.552,39.02 r0 top
Designator43_8_7_1 "Comment" PROTO2WL -14.552,36.48 r0 top
Designator43_8_8_1 "Comment" PROTO2WL -14.552,33.94 r0 top
Designator43_8_9_1 "Comment" PROTO2WL -14.552,31.4 r0 top
Designator43_8_10_1 "Comment" PROTO2WL -17.092,28.86 r0 top
Designator43_8_11_1 "Comment" PROTO2WL -17.092,26.32 r0 top
Designator43_8_12_1 "Comment" PROTO2WL -17.092,23.78 r0 top
Designator43_8_13_1 "Comment" PROTO2WL -17.092,21.24 r0 top
Designator43_8_13_1 "Comment" PROTO2WL -17.092,18.7 r0 top
Designator43_8_13_2 "Comment" PROTO2WL -17.092,16.16 r0 top
Designator43_8_13_3 "Comment" PROTO2WL -17.092,13.62 r0 top
Designator43_8_13_4 "Comment" PROTO2WL -17.092,11.08 r0 top
Designator43_8_18_1 "Comment" PROTO2WL -17.092,8.54 r0 top
Designator43_8_19 "Comment" PROTO2WL -19.632,8.54 r0 top
Designator195 "Comment" 1X08 -53.903,8.795 r0 bottom (schematic designator U$4)
Designator195_1 "Comment" 1X08 -53.903,11.335 r0 bottom (schematic designator U$4)
Designator196 "Comment" 1X08 -32.059,8.795 r0 bottom (schematic designator U$3)
Designator196_1 "Comment" 1X08 -32.059,11.335 r0 bottom (schematic designator U$3)
Designator198 "Comment" 1X06 -29.495,57.055 r0 bottom (schematic designator U$2)
Designator199 "Comment" 1X06 -29.495,59.595 r0 bottom (schematic designator U$2)

## Footprints (in the part's own frame and the unit in brackets; to place one, negate y for a bottom-side part, rotate by r counter-clockwise, add the part's x,y. Pads: shape width x height; smd on the part's side, far side on the other; paste and mask are expansions set on the pad)
1X06 [mm]
  oct 1.93x1.6 hole 1.1: 1(-6.35,0) 2(-3.81,0) 3(-1.27,0) 4(1.27,0) 5(3.81,0) 6(6.35,0)
  silkscreen extent -7.62,-1.27 7.62,1.27
1X08 [mm]
  oct 1.93x1.6 hole 1.1: 1(-8.89,0) 2(-6.35,0) 3(-3.81,0) 4(-1.27,0) 5(1.27,0) 6(3.81,0) 7(6.35,0) 8(8.89,0)
  silkscreen extent -10.16,-1.27 10.16,1.27
PROTO2WL [mm]
  oct 1.5x1.5 hole 1.1 unplated: 1(0,0)
  rect 1.016x2.159 smd far side: 1(0,0)
  rect 2.159x1.016 smd: 1(0,0)
  oct 1x1 all layers, no hole: 2(1.27,-1.27)
  oct 1x1.3 smd far side: 2(1.27,-1.27)
  oct 1.3x1 smd: 2(1.27,-1.27)
  Top Layer region: -0.375,-1.3 -0.178,-1.3 -0.178,-1.079 -0.375,-1.079
  Top Layer region: -0.375,-1.46 -0.178,-1.46 -0.178,-1.24 -0.375,-1.24
  Top Layer lines w0.381: -0.178,-1.27 0.843,-1.27
  Bottom Layer region: 1.24,0.375 1.24,0.178 1.46,0.178 1.46,0.375
  Bottom Layer region: 1.079,0.375 1.079,0.178 1.3,0.178 1.3,0.375
  Bottom Layer lines w0.381: 1.27,-0.843 1.27,0.178

## Free pads (board coordinates)
  rect 1.5x1.016 smd far side: 1(-86.005,8.54) 1(-86.005,11.08) 1(-86.005,13.62) 1(-86.005,16.16) 1(-86.005,18.7) 1(-86.005,21.24) 1(-86.005,23.78) 1(-86.005,41.56) 1(-86.005,44.1) 1(-86.005,46.64) 1(-86.005,49.18) 1(-86.005,51.72) 1(-86.005,54.26) 1(-86.005,56.8) 1(-75.867,28.86) 1(-75.867,31.4) 1(-75.867,33.94) 1(-75.867,36.48) 1(-29.437,26.32) 1(-29.437,28.86) 1(-29.437,31.4) 1(-29.437,33.94) 1(-29.437,36.48) 1(-29.437,39.02) 1(-19.965,51.72) 1(-19.965,54.26) 1(-19.965,56.8) 1(-4.06,8.54) 1(-4.06,11.08) 1(-4.06,13.62) 1(-4.06,16.16) 1(-4.06,18.7) 1(-4.06,21.24) 1(-4.06,23.78) 1(-4.06,26.32) 1(-4.06,28.86) 1(-4.06,31.4) 1(-4.06,33.94) 1(-4.06,36.48) 1(-4.06,39.02) 1(-4.06,41.56) 1(-4.06,44.1) 1(-4.06,46.64) 1(-4.06,49.18) 1(-4.06,51.72) 1(-4.06,54.26) 1(-4.06,56.8)
  rect 1.5x1.8 smd far side: 1(-86.001,28.988) 1(-86.001,36.352)
  round 5 hole 3: 1(-85.695,3.46) 1(-85.695,61.88) 1(-2.593,3.46) 1(-2.593,61.88)
  rect 1.016x1.5 smd: 1(-85.672,57.132) 1(-83.132,57.132) 1(-80.592,57.132) 1(-78.052,57.132) 1(-75.512,57.132) 1(-70.432,46.972) 1(-67.892,46.972) 1(-65.352,46.972) 1(-62.812,15.828) 1(-62.812,46.972) 1(-60.272,15.828) 1(-60.272,46.972) 1(-57.732,15.828) 1(-57.732,46.972) 1(-55.192,15.828) 1(-55.192,49.512) 1(-52.652,15.828) 1(-52.652,49.512) 1(-50.112,15.828) 1(-50.112,49.512) 1(-47.572,15.828) 1(-47.572,49.512) 1(-45.032,15.828) 1(-45.032,49.512) 1(-42.492,15.828) 1(-42.492,49.512) 1(-39.952,15.828) 1(-39.952,49.512) 1(-37.412,15.828) 1(-37.412,49.512) 1(-34.872,15.828) 1(-34.872,49.512) 1(-32.332,15.828) 1(-32.332,49.512) 1(-29.792,15.828) 1(-29.792,49.512) 1(-27.252,15.828) 1(-27.252,49.512) 1(-24.712,15.828) 1(-24.712,49.512) 1(-22.172,15.828) 1(-22.172,49.512) 1(-19.632,57.132) 1(-17.092,57.132) 1(-14.552,57.132) 1(-12.012,57.132) 1(-9.472,57.132) 1(-6.932,57.132) 1(-4.392,57.132)
  rect 1.4x0.305 smd far side: 1(-83.301,31.36) 2(-83.301,32.01) 3(-83.301,32.66) 4(-83.301,33.31) 5(-83.301,33.96)
  rect 2.3x0.5 smd far side: 1(-80.6,31.063) 2(-80.6,31.863) 3(-80.6,32.663) 5(-80.6,34.263)
  oct 1.5x1.6 hole 1: 1(-77.578,28.858) 4(-77.578,36.478)
  oct 1.5x1.5 hole 1.1 unplated: 1(-75.535,28.86) 1(-75.535,31.4) 1(-75.535,33.94) 1(-75.535,36.48) 1(-75.535,39.02) 1(-65.352,16.16) 1(-62.812,16.16) 1(-60.272,16.16) 1(-57.732,16.16) 1(-55.192,16.16) 1(-52.652,16.16) 1(-50.112,16.16) 1(-47.572,16.16) 1(-45.032,16.16) 1(-42.492,16.16) 1(-39.952,16.16) 1(-37.412,16.16) 1(-34.872,16.16) 1(-32.332,16.16) 1(-29.792,16.16) 1(-29.792,41.56) 1(-29.769,26.32) 1(-29.769,28.86) 1(-29.769,31.4) 1(-29.769,33.94) 1(-29.769,36.48) 1(-29.769,39.02) 1(-27.252,16.16) 1(-27.252,41.56) 1(-24.712,16.16) 1(-22.172,16.16) 1(-4.392,8.54) 1(-4.392,11.08) 1(-4.392,13.62) 1(-4.392,16.16) 1(-4.392,18.7) 1(-4.392,21.24) 1(-4.392,23.78) 1(-4.392,26.32) 1(-4.392,28.86) 1(-4.392,31.4) 1(-4.392,33.94) 1(-4.392,36.48) 1(-4.392,39.02) 1(-4.392,41.56) 1(-4.392,44.1) 1(-4.392,46.64) 1(-4.392,49.18) 1(-4.392,51.72) 1(-4.392,54.26) 1(-4.392,56.8)
  rect 1.016x2.159 smd far side: 1(-75.535,28.86) 1(-75.535,31.4) 1(-75.535,33.94) 1(-75.535,36.48) 1(-75.535,39.02) 1(-65.352,16.16) 1(-62.812,16.16) 1(-60.272,16.16) 1(-57.732,16.16) 1(-55.192,16.16) 1(-52.652,16.16) 1(-50.112,16.16) 1(-47.572,16.16) 1(-45.032,16.16) 1(-42.492,16.16) 1(-39.952,16.16) 1(-37.412,16.16) 1(-34.872,16.16) 1(-32.332,16.16) 1(-29.792,16.16) 1(-29.792,41.56) 1(-29.769,26.32) 1(-29.769,28.86) 1(-29.769,31.4) 1(-29.769,33.94) 1(-29.769,36.48) 1(-29.769,39.02) 1(-27.252,16.16) 1(-27.252,41.56) 1(-24.712,16.16) 1(-22.172,16.16) 1(-4.392,8.54) 1(-4.392,11.08) 1(-4.392,13.62) 1(-4.392,16.16) 1(-4.392,18.7) 1(-4.392,21.24) 1(-4.392,23.78) 1(-4.392,26.32) 1(-4.392,28.86) 1(-4.392,31.4) 1(-4.392,33.94) 1(-4.392,36.48) 1(-4.392,39.02) 1(-4.392,41.56) 1(-4.392,44.1) 1(-4.392,46.64) 1(-4.392,49.18) 1(-4.392,51.72) 1(-4.392,54.26) 1(-4.392,56.8)
  rect 2.159x1.016 smd: 1(-75.535,28.86) 1(-75.535,31.4) 1(-75.535,33.94) 1(-75.535,36.48) 1(-75.535,39.02) 1(-65.352,16.16) 1(-62.812,16.16) 1(-60.272,16.16) 1(-57.732,16.16) 1(-55.192,16.16) 1(-52.652,16.16) 1(-50.112,16.16) 1(-47.572,16.16) 1(-45.032,16.16) 1(-42.492,16.16) 1(-39.952,16.16) 1(-37.412,16.16) 1(-34.872,16.16) 1(-32.332,16.16) 1(-29.792,16.16) 1(-29.792,41.56) 1(-29.769,26.32) 1(-29.769,28.86) 1(-29.769,31.4) 1(-29.769,33.94) 1(-29.769,36.48) 1(-29.769,39.02) 1(-27.252,16.16) 1(-27.252,41.56) 1(-24.712,16.16) 1(-22.172,16.16) 1(-4.392,8.54) 1(-4.392,11.08) 1(-4.392,13.62) 1(-4.392,16.16) 1(-4.392,18.7) 1(-4.392,21.24) 1(-4.392,23.78) 1(-4.392,26.32) 1(-4.392,28.86) 1(-4.392,31.4) 1(-4.392,33.94) 1(-4.392,36.48) 1(-4.392,39.02) 1(-4.392,41.56) 1(-4.392,44.1) 1(-4.392,46.64) 1(-4.392,49.18) 1(-4.392,51.72) 1(-4.392,54.26) 1(-4.392,56.8)
  rect 0.8x1.5 all layers, no hole: 1(-70.413,48.941) 2(-67.873,48.941) 3(-65.333,48.941) 4(-62.793,48.941) 5(-60.253,48.941) 6(-57.713,48.941)
  round 1.6 hole 1: 1(-70.413,49.435) 2(-67.873,49.435) 3(-65.333,49.435) 4(-62.793,49.435) 5(-60.253,49.435) 6(-57.713,49.435)
  oval 1.5x1.6 hole 1: 1(-70.413,51.975) 2(-70.413,54.515) 3(-67.873,51.975) 4(-67.873,54.515) 5(-65.333,51.975) 6(-65.333,54.515)
  oct 1.6x1.93 hole 1.1: 1(-62.793,13.875) 1(-52.633,51.465) 1(-42.473,13.875) 1(-37.393,51.465) 2(-60.253,13.875) 2(-50.093,51.465) 2(-39.933,13.875) 2(-34.853,51.465) 3(-57.713,13.875) 3(-47.553,51.465) 3(-37.393,13.875) 3(-32.313,51.465) 4(-55.173,13.875) 4(-45.013,51.465) 4(-34.853,13.875) 4(-29.773,51.465) 5(-52.633,13.875) 5(-42.473,51.465) 5(-32.313,13.875) 5(-27.233,51.465) 6(-50.093,13.875) 6(-39.933,51.465) 6(-29.773,13.875) 6(-24.693,51.465) 7(-47.553,13.875) 7(-27.233,13.875) 8(-45.013,13.875) 8(-24.693,13.875)
  oct 1.93x1.6 hole 1.1: 1(-53.903,57.055) 1(-53.903,59.595) 2(-51.363,57.055) 2(-51.363,59.595) 3(-48.823,57.055) 3(-48.823,59.595) 4(-46.283,57.055) 4(-46.283,59.595) 5(-43.743,57.055) 5(-43.743,59.595) 6(-41.203,57.055) 6(-41.203,59.595)
  oct 1.6x1.5 hole 1.1: 1(-27.252,26.318) 1(-23.245,29.13) 2(-27.252,28.858) 3(-27.252,31.398) 3(-23.245,31.67) 4(-27.252,33.938) 4(-20.705,31.67) 5(-27.252,36.478) 5(-23.245,34.21) 6(-27.252,39.018) 6(-20.705,34.21)
  rect 0.762x1.524 smd: 1(-18.941,60.1) 2(-17.841,60.1) 3(-16.741,60.1) 4(-15.641,60.1) 5(-14.541,60.1) 6(-13.441,60.1) 7(-12.341,60.1) 8(-11.241,60.1) 9(-10.141,60.1)
  rect 0.7x0.7 hole 0.5: 1(-17.841,60.1) 1(-15.641,60.1) 1(-13.441,60.1) 1(-11.241,60.1)
  rect 0.762x1.524 smd far side: 1(-10.141,60.1) 2(-11.241,60.1) 3(-12.341,60.1) 4(-13.441,60.1) 5(-14.541,60.1) 6(-15.641,60.1) 7(-16.741,60.1) 8(-17.841,60.1) 9(-18.941,60.1)
  oct 1.5x2 hole 1: 2(-77.578,31.398) 3(-77.578,33.938)
  oct 1x1 all layers, no hole: 2(-74.265,27.59) 2(-74.265,30.13) 2(-74.265,32.67) 2(-74.265,35.21) 2(-74.265,37.75)
  oct 1x1.3 smd far side: 2(-74.265,27.59) 2(-74.265,30.13) 2(-74.265,32.67) 2(-74.265,35.21) 2(-74.265,37.75)
  oct 1.3x1 smd: 2(-74.265,27.59) 2(-74.265,30.13) 2(-74.265,32.67) 2(-74.265,35.21) 2(-74.265,37.75)
  oct 1.5x1.6 hole 1.1: 2(-20.705,29.13)
  rect 2.3x0.457 smd far side: 4(-80.6,33.463)
  rect 2.5x2 smd far side: 6(-80.7,37.113) 7(-86.2,37.113) 8(-80.7,28.213) 9(-86.2,28.213)
  oval 1.4x0.9 hole 0.9 unplated: MH1(-83.2,34.863) MH2(-83.2,30.463)
  rect 0x0 smd: P1(-83.26,33.995) P2(-83.26,33.345) P3(-83.26,32.695) P4(-83.26,32.045) P5(-83.26,31.395)
  round 1.524 hole 0.8 slot 1.5 at 0 deg: ""(-86.001,36.352) ""(-86.001,28.988)
  round 0.3 hole 0.5: ""(-83.801,30.76) ""(-83.801,34.56)
  rect 1.2x1.2 smd far side: ""(-83.268,29.178) ""(-83.268,36.213)
  oct 1.6x1.5 all layers, no hole: ""(-27.6,26.318) ""(-27.6,28.858) ""(-27.6,31.398) ""(-27.6,33.938) ""(-27.6,36.478) ""(-27.6,39.018)